# Altium PCB SMALL V2.PcbDoc
Units mm, origin at the board's own origin, x right, y up, seen from the top; angles counter-clockwise.
Board outline 29.78 x 39.33 mm, 2 copper layers (Top Layer, Bottom Layer); 33 components, 22 nets, 84 pads, 10 vias.
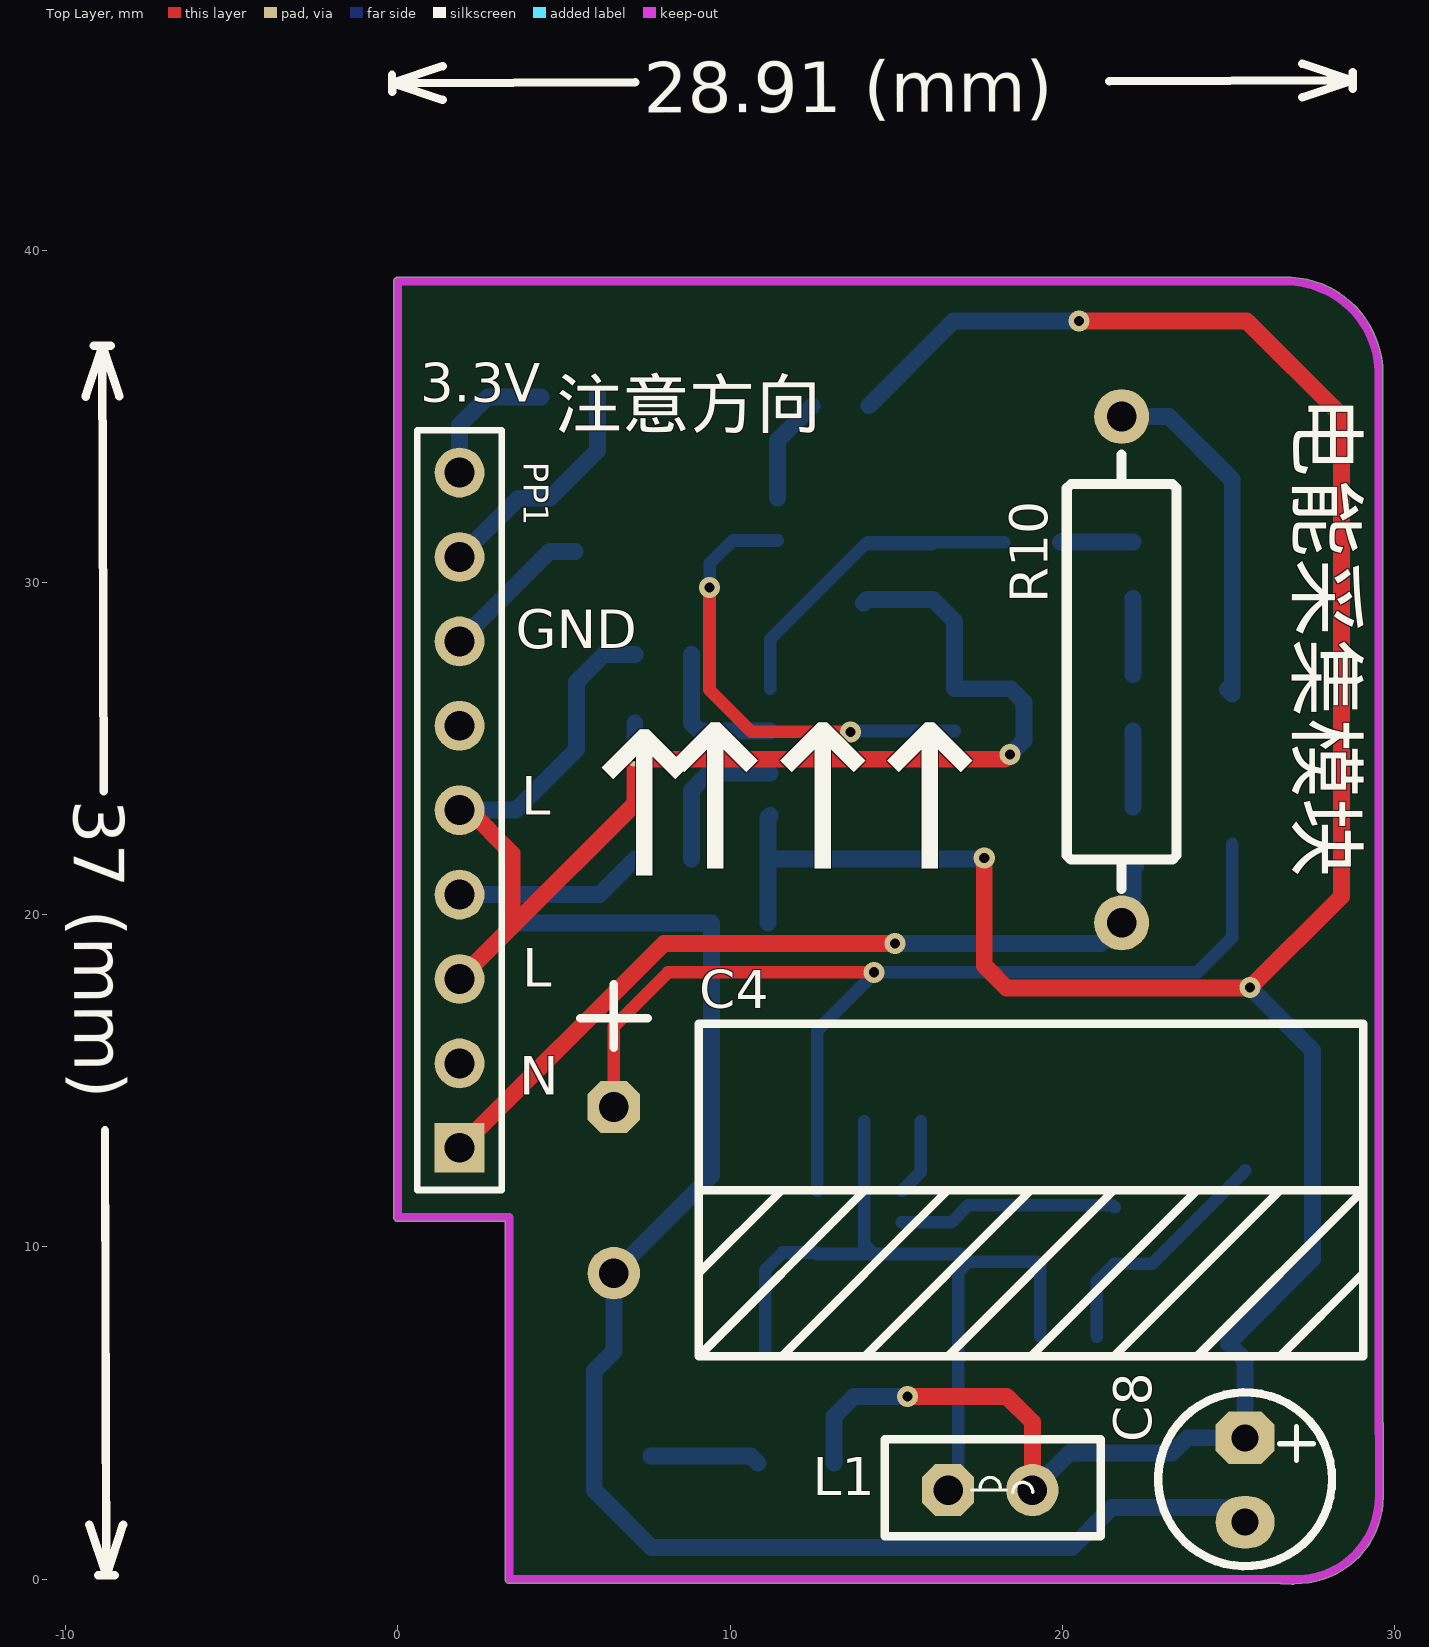
[diagram p0: Top Layer view]
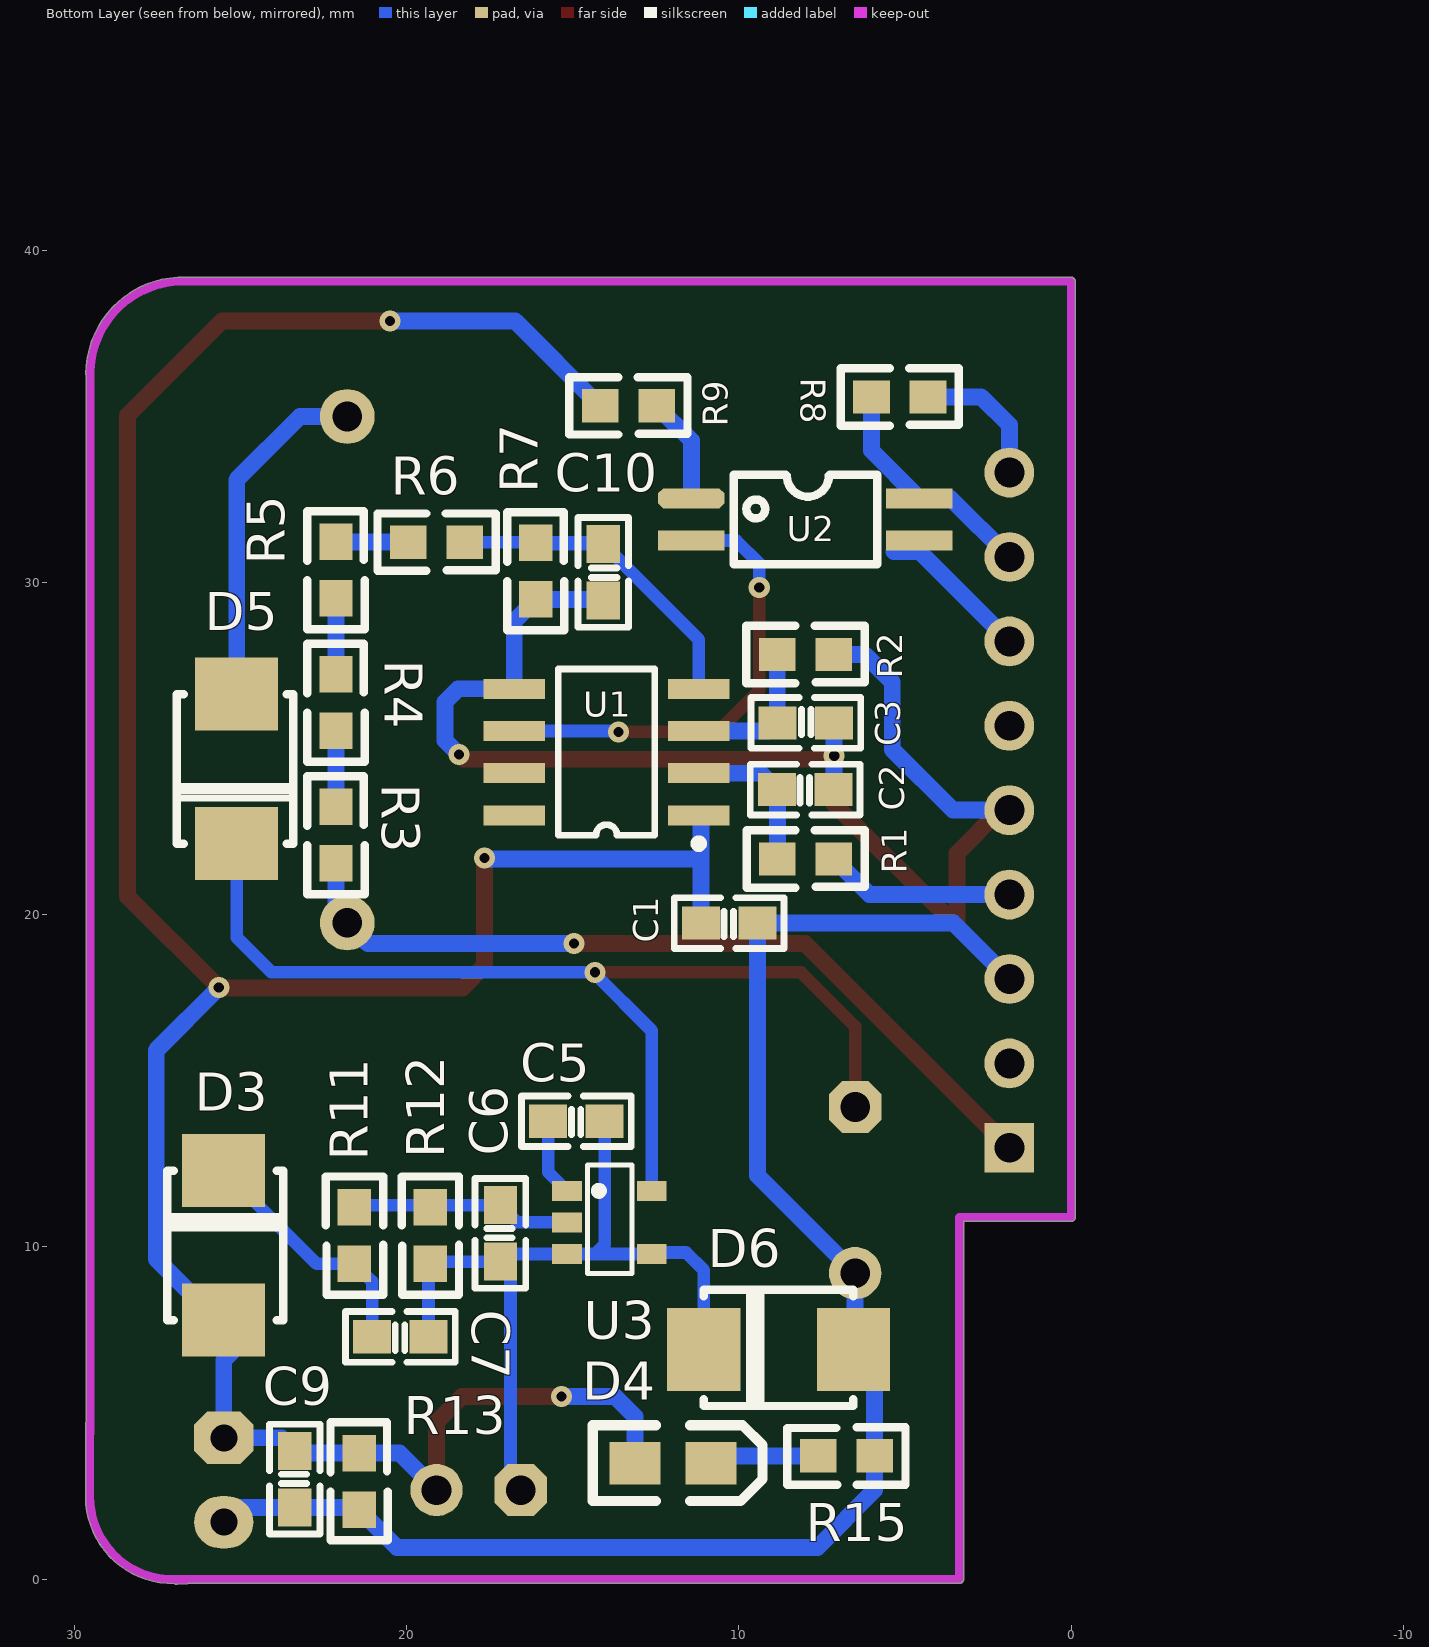
[diagram p1: Bottom Layer view, seen from below]
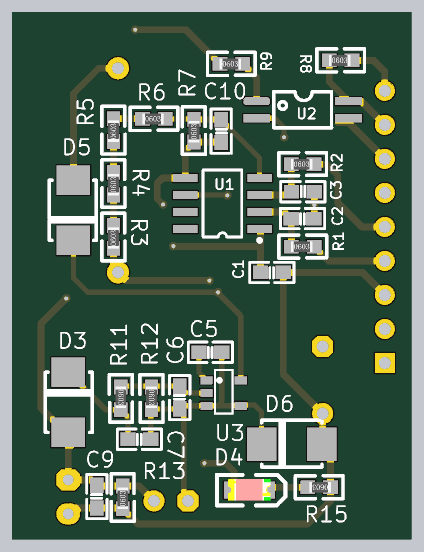
[diagram p2: 3D render of the assembled board from below, using the file's embedded part models]

## Layer stack, top to bottom
Top Solder: solder mask 0.0102, Solder Resist, Dk 3.5
Top Layer: signal copper 0.0356
Dielectric1: dielectric 0.32, FR-4, Dk 4.8
Bottom Layer: signal copper 0.0356
Bottom Solder: solder mask 0.0102, Solder Resist, Dk 3.5

## Board outline
3.231,0.015 cw(c3.358,0.03) 3.23,0.03 3.23,10.767 0,10.767 cw(c0,10.894) -0.127,10.894 -0.127,39.055 cw(c0,39.055) 0,39.182 26.873,39.182 cw(c26.873,39.055) 26.88,39.182 cw(c26.729,36.271) 29.643,36.271 cw(c26.729,36.271) 29.64,36.124 29.64,4.727 cw(c29.525,4.671) 29.652,4.671 29.652,2.484 cw(c27.039,2.484) 26.982,-0.129 cw(c26.908,-0.025) 26.902,-0.152 26.616,-0.137 cw(c26.622,-0.01) 26.572,-0.127 3.358,-0.127 cw(c3.358,0)

## Design rules (kind name [scope] priority, off if disabled: settings)
Clearance [All] p1: gap=0.254
PolygonConnect [All] p1: connectstyle=Relief reliefconductorwidth=0.254 reliefentries=4 polygonreliefangle="90 Angle" airgapwidth=0.254
RoutingVias [All] p1: holewidth=0.305 width=0.635 viastyle="Through Hole" minholewidth=0.305 minwidth=0.635 maxholewidth=0.635 maxwidth=1.27
SolderMaskExpansion [All] p1: expansion=0.102
Width [All] p1: maxlimit=5.08 minlimit=0.254 preferedwidth=0.254
30 further rules are at their usual default settings.

## Components (designator, comment, footprint, x,y, rotation, side; value= is the part's Value field where it differs from the comment)
C1 "0.1uF" C0603 11.14,19.746 r180 bottom
C2 "33nf" C0603 8.854,23.764 r180 bottom
C3 "33nf" C0603 7.127,25.771 r0 bottom
C4 "400V/4.7UF 体积8*12mm" 4.7/400 9.055,11.712 r0 top locked
C5 "2.2uF/10V" C0603 15.735,13.785 r180 bottom
C6 "1nF/50V" C0603 17.173,11.257 r270 bottom
C7 "220nF/16V" C0603 21.034,7.295 r180 bottom
C8 "100uF/16V" RB.1/.2 25.497,4.257 r270 top
C9 "1uF/50V" C0603 23.36,3.861 r270 bottom
C10 "33nF" C0603 14.077,29.449 r90 bottom
D3 "1N4007" DO-214 25.504,12.299 r270 bottom
D4 "LED3" L-0805 11.979,3.492 r180 bottom
D5 "1N4007" DO-214 25.108,22.136 r90 bottom
D6 "US1J/600V.1A" DO-214 11.052,6.914 r180 bottom
L1 "LGA0410-102" L-8*10 16.556,2.685 r0 top
PP1 "Header 9" HDR1X9 1.857,12.984 r90 top
R1 "1K" 3-0603 7.986,21.674 r180 bottom
R2 "1K" 3-0603 7.991,27.828 r180 bottom
R3 "470K" 3-0603 22.118,22.393 r90 bottom
R4 "470K" 3-0603 22.118,26.38 r90 bottom
R5 "470K" 3-0603 22.118,30.368 r90 bottom
R6 "470K" 3-0603 19.093,31.209 r180 bottom
R7 "1K" 3-0603 16.109,30.338 r90 bottom
R8 "2KΩ" 3-0603 5.154,35.578 r180 bottom
R9 "1KΩ" 3-0603 13.32,35.314 r180 bottom
R10 "39Ω/1W" AXIAL0.6 21.78,19.751 r90 top
R11 "4.99KΩ/1%" 3-0603 21.567,10.343 r270 bottom
R12 "4.99KΩ/1%" 3-0603 19.281,10.343 r270 bottom
R13 "10KΩ" 3-0603 21.422,2.946 r90 bottom
R15 "1K" 3-0603 6.759,3.713 r0 bottom
U1 "HLW8012" SOP8 11.204,22.987 r90 bottom
U2 "TLP291" PS2811-SOP4 11.425,32.53 r180 bottom
U3 "MP157GJ" SOT-23-5 15.166,11.689 r180 bottom

## Footprints (in the part's own frame and the unit in brackets; to place one, negate y for a bottom-side part, rotate by r counter-clockwise, add the part's x,y. Pads: shape width x height; smd on the part's side, far side on the other; paste and mask are expansions set on the pad)
3-0603 [mm]
  rect 1.1x1 smd: 1(-0.85,0) 2(0.85,0)
  silkscreen extent -1.78,-0.86 1.78,0.86, body extent -0.88,-0.4 0.72,0.4, height 0.96
4.7/400 [mil]
  oct 62x62 hole 35: 1(-100.67,98.43)
  round 62 hole 35: 2(-100.67,-98.43)
  silkscreen extent -141,-197 787,244
AXIAL0.6 [mil]
  round 65 hole 35: 1(0,0) 2(600,0)
  silkscreen extent 40,-65 555,65
C0603 [mm]
  rect 1.143x1 smd: 1(0,0) 2(1.7,0)
  silkscreen extent -0.8,-0.76 2.5,0.76
DO-214 [mm]
  rect 2.2x2.5 smd: 1(4.5,0) 2(0,0)
  silkscreen extent 0,-1.7 4.5,1.8
HDR1X9 [mm] "Connector; Header; 9 Position"
  rect 1.5x1.5 hole 0.9: 1(0,0)
  round 1.5 hole 0.9: 2(2.54,0) 3(5.08,0) 4(7.62,0) 5(10.16,0) 6(12.7,0) 7(15.24,0) 8(17.78,0) 9(20.32,0)
  silkscreen extent -1.27,-1.27 21.59,1.27
L-8*10 [mil]
  oct 62x62 hole 35: 1(0,0)
  round 62 hole 35: 2(100,0)
  silkscreen extent -75,-55 181,60
L-0805 [mil]
  rect 60x50 smd: 1(-45,0) 2(45,0)
  silkscreen extent -95,-45 106,45, body extent -63,-30 63,33, height 43
PS2811-SOP4 [mm]
  oct 2x0.6 smd: 1(0,0)
  rect 2x0.6 smd: 2(0,-1.27) 3(6.858,-1.27) 4(6.858,0)
  silkscreen extent 1.27,-1.99 5.6,0.71
RB.1/.2 [mil]
  oct 62x70 hole 32: 1(0,0)
  oval 62x70 hole 32: 2(100,0)
  silkscreen extent -54,-103 152,103
SOP8 [mm]
  rect 0.6x1.85 smd: 1(0,0) 2(1.27,0) 3(2.54,0) 4(3.81,0) 5(3.81,5.55) 6(2.54,5.55) 7(1.27,5.55) 8(0,5.55)
  silkscreen extent -0.97,-0.12 4.41,4.23
SOT-23-5 [mm]
  rect 0.9x0.6 smd: 1(0,0) 2(0,-0.95) 3(0,-1.9) 4(2.55,-1.9) 5(2.55,0)
  silkscreen extent 0.61,-2.49 1.95,0.78

## Part data
C1 C2 C3: library part CAP, "Capacitor"
C4 C8: library part "Cap Pol2", "插件电解电容"
C5 C6 C7 C9: library part Cap, "贴片电容"
C10: library part 贴片电容, "贴片电容"
D3 D5 D6: library part 二极管, "贴片二极管"
D4: "红色贴片二极管"
L1: library part INDUCTOR
PP1: "Header, 9-Pin"
R1 R2 R8 R9: library part Res1, "Resistor"
R3 R4 R5 R6 R7 R11 R12 R13: library part Res1, "贴片电阻"
R10: library part Res1, "直插电阻"
R15: library part Res3, "贴片电阻"
U2: library part TLP521-1, "TLP28-2P"
U3: library part MP150, "电源芯片"

## Via types
v1: diameter 0.635, hole 0.305, Top Layer to Bottom Layer, tented both sides, 10 vias

## Nets (pads, with @x,y where several pads share a name; then routed paths per layer and width w, separated by ;. In a path a pad name is that pad's centre, name@x,y a point inside that pad or via, vN(x,y) a via of type N, cw(c..) or ccw(c..) an arc to the next point about the centre after c; other vN are vias at no path point)
+3.3V: PP1.9 R8.2 | length 4.2
  Bottom Layer w0.508: PP1.9 1.857,34.732 2.703,35.578 R8.2
+5VV: C1.1 C8.1 C9.1 D3.1 D4.1 L1.2 R9.1 R13.2 U1.1 | length 88.8
  Top Layer w0.508: v1(15.331,5.502) 18.324,5.502 19.096,4.729 L1.2 ; v1(17.645,21.709) 17.645,18.466 18.313,17.798 25.641,17.798 v1(25.646,17.803) 28.392,20.549 28.392,35.022 25.545,37.869 v1(20.493,37.869)
  Bottom Layer w0.508: C1.1 11.14,21.674 ; U1.1 11.14,22.924 11.14,21.674 ; D4.1 13.122,4.897 13.726,5.502 v1(15.331,5.502) ; R9.1 16.725,37.869 v1(20.493,37.869) ; v1(17.645,21.709) 17.61,21.674 11.14,21.674 ; L1.2 20.207,3.796 R13.2 23.296,3.796 C9.1 23.757,4.257 C8.1 25.497,6.6 24.996,7.1 27.529,9.633 27.529,15.921 v1(25.646,17.803)
GND: PP1.7 U2.3 | length 4.6
  Bottom Layer w0.508: PP1.7 4.564,30.932 5.326,30.932
L: C1.2 C2.2 C3.1 C4.2 C8.2 C9.2 C10.1 D6.1 PP1.3 PP1.5 R2.2 R7.1 R13.1 R15.1 U1.5 | length 91.9
  Top Layer w0.508: PP1.3 3.437,19.644 ; PP1.5 2.134,23.144 3.437,21.841 3.437,19.644 ; v1(18.418,24.816) 18.278,24.676 7.232,24.676 v1(7.127,24.781) 7.127,23.335 3.437,19.644
  Bottom Layer w0.508: PP1.3 3.538,19.746 C1.2 9.44,12.154 C4.2 6.498,6.86 5.909,6.271 R15.1 5.909,2.684 7.633,0.96 20.286,0.96 R13.1 21.487,2.161 C9.2 25.053,2.161 C8.2 ; PP1.5 3.556,23.144 5.38,24.968 5.38,27 6.208,27.828 R2.2 ; C3.1 v1(7.127,24.781) 7.127,23.791 C2.2 ; C10.1@14.008,29.38 C10.1 14.116,29.488 R7.1 16.754,28.843 U1.5 18.445,26.797 18.844,26.398 18.844,25.243 v1(18.418,24.816)
N: PP1.1 R3.1 R10.1 | length 24.8
  Top Layer w0.508: PP1.1 8.006,19.134 v1(14.958,19.134)
  Bottom Layer w0.508: v1(14.958,19.134) 21.163,19.134 R10.1 22.118,20.089 R3.1 R3.1@22.195,21.466
NetC2_1: C2.1 R1.1 U1.2 | length 4.7
  Bottom Layer w0.508: R1.1 8.836,23.746 C2.1 9.347,24.257 U1.2
NetC3_2: C3.2 R2.1 U1.3 | length 4.5
  Bottom Layer w0.508: R2.1 8.841,25.784 C3.2 9.071,25.527 U1.3
NetC4_1: C4.1 D5.2 U3.5 | length 32.2
  Top Layer w0.381: C4.1 6.498,16.638 8.125,18.265 v1(14.323,18.265)
  Bottom Layer w0.381: U3.5 12.616,16.505 v1@14.35,18.238 ; v1@14.379,18.268 24.064,18.268 25.042,19.246 25.108,19.312 D5.2
NetC5_1: C5.1 U3.1 | length 2.3
  Bottom Layer w0.381: U3.1 15.735,12.258 C5.1
NetC5_2: C5.2 C6.2 C7.2 D6.2 L1.1 R12.2 U3.3 U3.4 | length 24.6
  Bottom Layer w0.381: D6.2 11.052,9.301 11.585,9.835 12.571,9.835 U3.4 14.321,9.789 ; C5.2 14.035,10.074 14.321,9.789 ; L1.1@16.855,2.357 16.868,2.37 16.868,9.252 C6.2 ; C7.2 19.334,9.44 R12.2 19.217,9.557 C6.2 ; 14.321,9.789 U3.3 16.941,9.789 C6.2
NetC6_1: C6.1 R11.1 R12.1 U3.2 | length 6.6
  Bottom Layer w0.381: U3.2 16.655,10.739 C6.1 21.503,11.257 R11.1
NetC7_1: C7.1 D3.2 R11.2 | length 7.5
  Bottom Layer w0.381: C7.1 21.034,8.959 R11.2 22.698,9.493 D3.2
NetC10_2: C10.2 R6.2 R7.2 U1.4 | length 11.8
  Bottom Layer w0.381: U1.4 11.204,28.276 C10.2 ; R7.2 16.07,31.149 C10.2 ; R6.2 14.137,31.209 C10.2
NetD4_2: D4.2 R15.2 | length 3.3
  Bottom Layer w0.508: R15.2 10.615,3.713 D4.2
NetD5_1: D5.1 R10.2 | length 10.8
  Bottom Layer w0.508: R10.2 23.205,34.991 25.108,33.089 D5.1 D5.1@24.971,26.773
NetPP1_4: PP1.4 R1.2 | length 5.7
  Bottom Layer w0.508: PP1.4 6.066,20.604 R1.2
NetR3_2: R3.2 R4.1 | length 2.3
  Bottom Layer w0.508: R3.2 R4.1
NetR4_2: R4.2 R5.1 | length 2.3
  Bottom Layer w0.508: R4.2 R5.1
NetR5_2: R5.2 R6.1 | length 2.2
  Bottom Layer w0.508: R6.1 19.952,31.218 R5.2
NetR9_2: R9.2 U2.1 | length 3.2
  Bottom Layer w0.508: U2.1 11.425,34.269 R9.2
P_CF2: U1.6 U2.2 | length 14
  Top Layer w0.381: v1@9.378,29.845 9.378,26.767 10.643,25.502 v1(13.617,25.502)
  Bottom Layer w0.381: v1(9.383,29.845) 9.383,30.566 10.076,31.26 U2.2 ; v1(13.617,25.502) 13.642,25.527 U1.6
V_I2: PP1.8 R8.1 U2.4 | length 7.2
  Bottom Layer w0.508: PP1.8 3.622,32.53 U2.4 6.004,33.967 R8.1 R8.1@6.004,35.705
pads on no net: PP1.2 PP1.6 U1.7 U1.8

## Keep-outs
Keep-Out Layer:
  lines w0.254: 3.358,0 26,0 27.061,0 ; 3.358,0.03 3.358,10.894 0,10.894 0,39.055 26.873,39.055 cw(c26.729,36.271) 29.512,36.127 29.512,4.382 ; 26.622,-0.01 26.908,-0.025 ; 26.91,0.001 ccw(c27.039,2.484) 29.525,2.524 ; 29.525,2.484 29.525,4.671

## Silkscreen, mask and mechanical layers (free items; w line width, h text height)
Top Overlay:
  lines w0.254: -9.395,35.59 -8.892,37.116 ; -9.284,1.638 -8.771,0.116 ; -9.146,37.115 -8.638,37.117 ; -9.025,0.115 -8.517,0.117 ; -8.848,23.72 -8.892,37.116 ; -8.815,13.512 -8.771,0.116 ; -8.379,35.594 -8.892,37.116 ; -8.268,1.642 -8.771,0.116 ; -0.178,45.278 -0.176,44.77 ; 1.345,45.536 -0.177,45.024 ; 1.348,44.52 -0.177,45.024 ; 7.143,45.045 -0.177,45.024 ; 21.413,45.085 28.733,45.105 ; 27.208,45.609 28.733,45.105 ; 27.211,44.593 28.733,45.105 ; 28.732,45.359 28.734,44.851
  text "板厚1.0mm 绿油白字 铜箔厚度35uM  做50块" at -43.457,94.137 h12.7
  text "28.91 (mm)" at 7.399,44.131 h1.52 r0.16
  text "电能采集模块" at 26.561,35.552 h3 r270
  text "3.3V" at 0.676,35.049 h2
  text "注意方向" at 4.765,34.188 h2.5
  text "GND" at 3.541,27.633 h2
  text "37 (mm)" at -9.762,23.463 h1.52 r270.19
  text "L" at 3.716,22.634 h2
  text "→" at 13.169,21.031 h9 r90
  text "→" at 16.391,21.031 h9 r90
  text "→" at 19.614,21.031 h9 r90
  text "→" at 11.024,20.828 h9 r90
  text "L" at 3.739,17.457 h2
  text "N" at 3.653,14.186 h2
Bottom Overlay:
  text "AC5V" at 26.667,-1.544 h2 r270